# Altium PCB SMS.PcbDoc
Units mm, origin at the board's own origin, x right, y up, seen from the top; angles counter-clockwise.
Board outline 38 x 48 mm, 2 copper layers (Top Layer, Bottom Layer); 37 components, 33 nets, 144 pads, 37 vias.
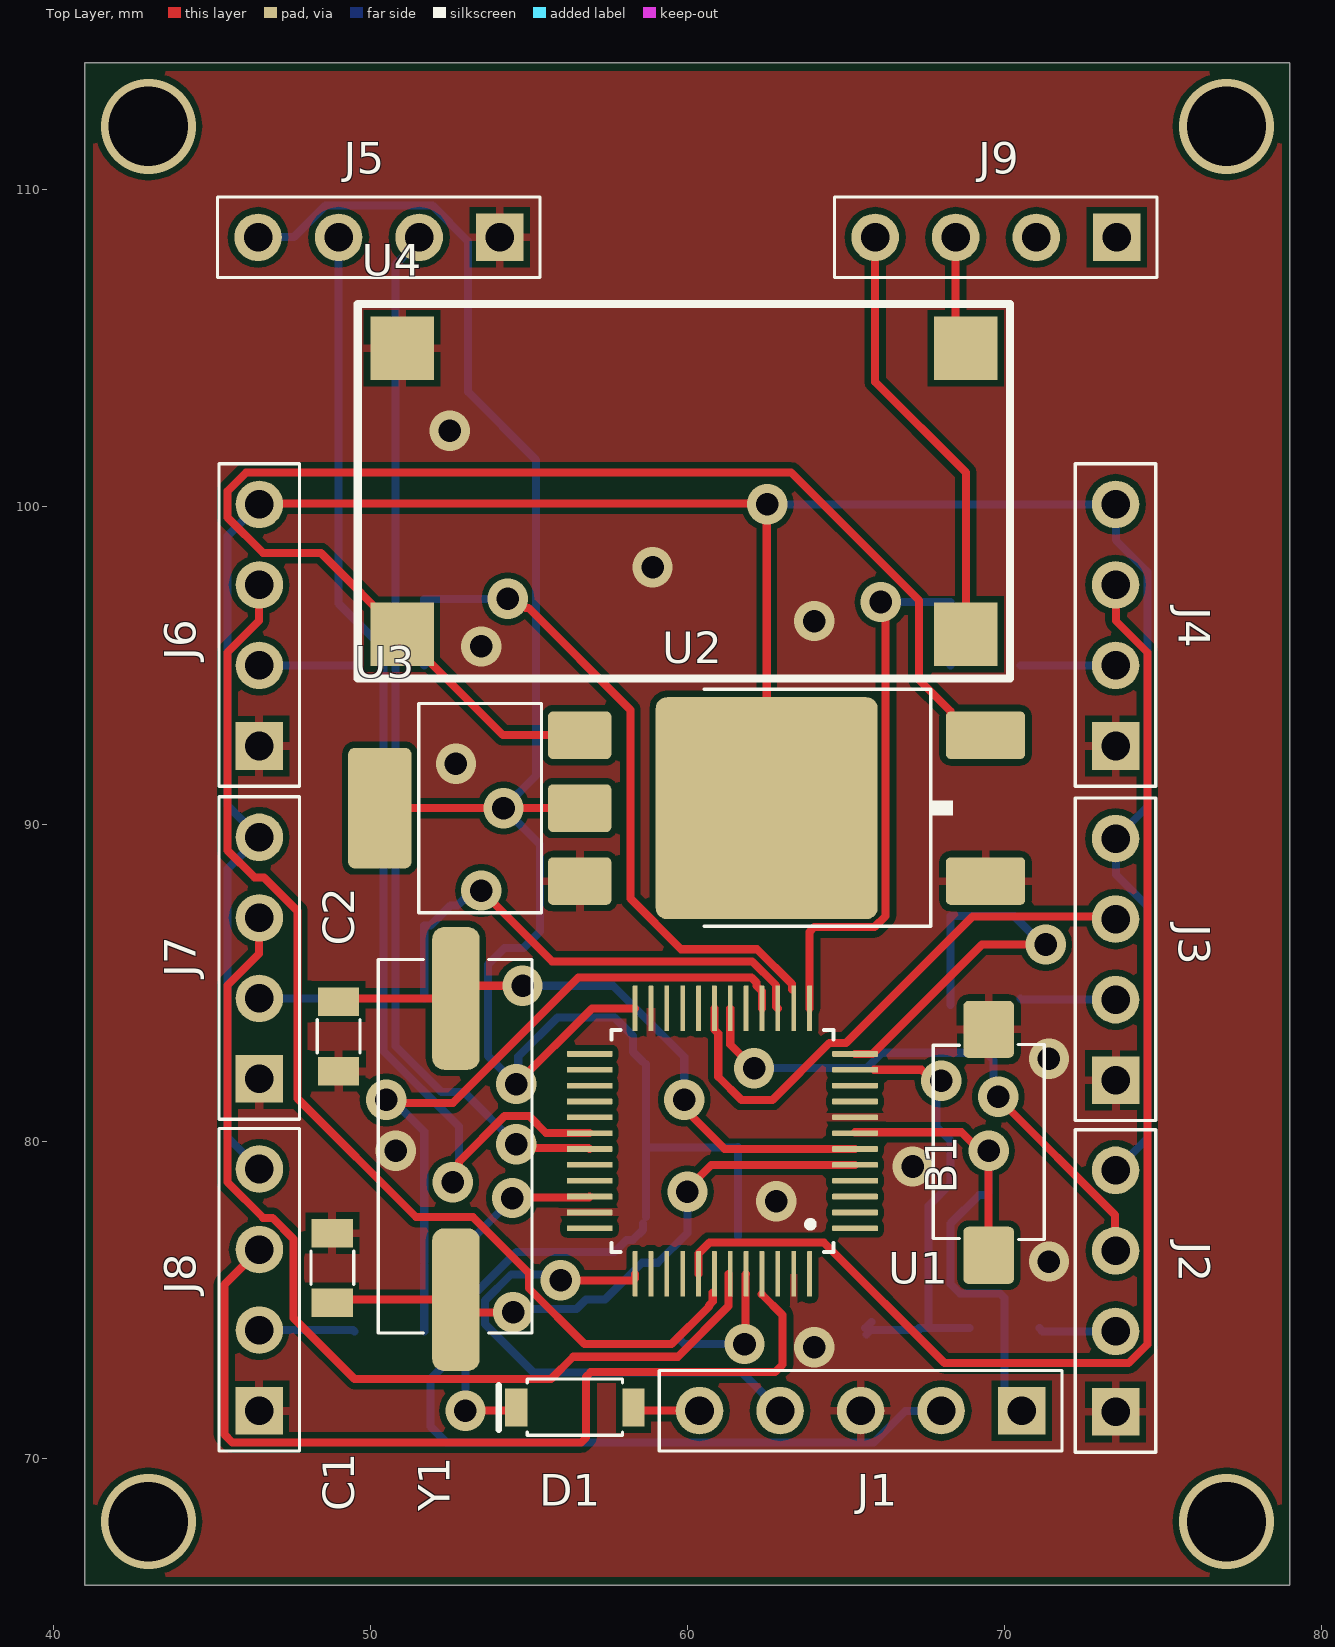
[diagram p0: Top Layer view]
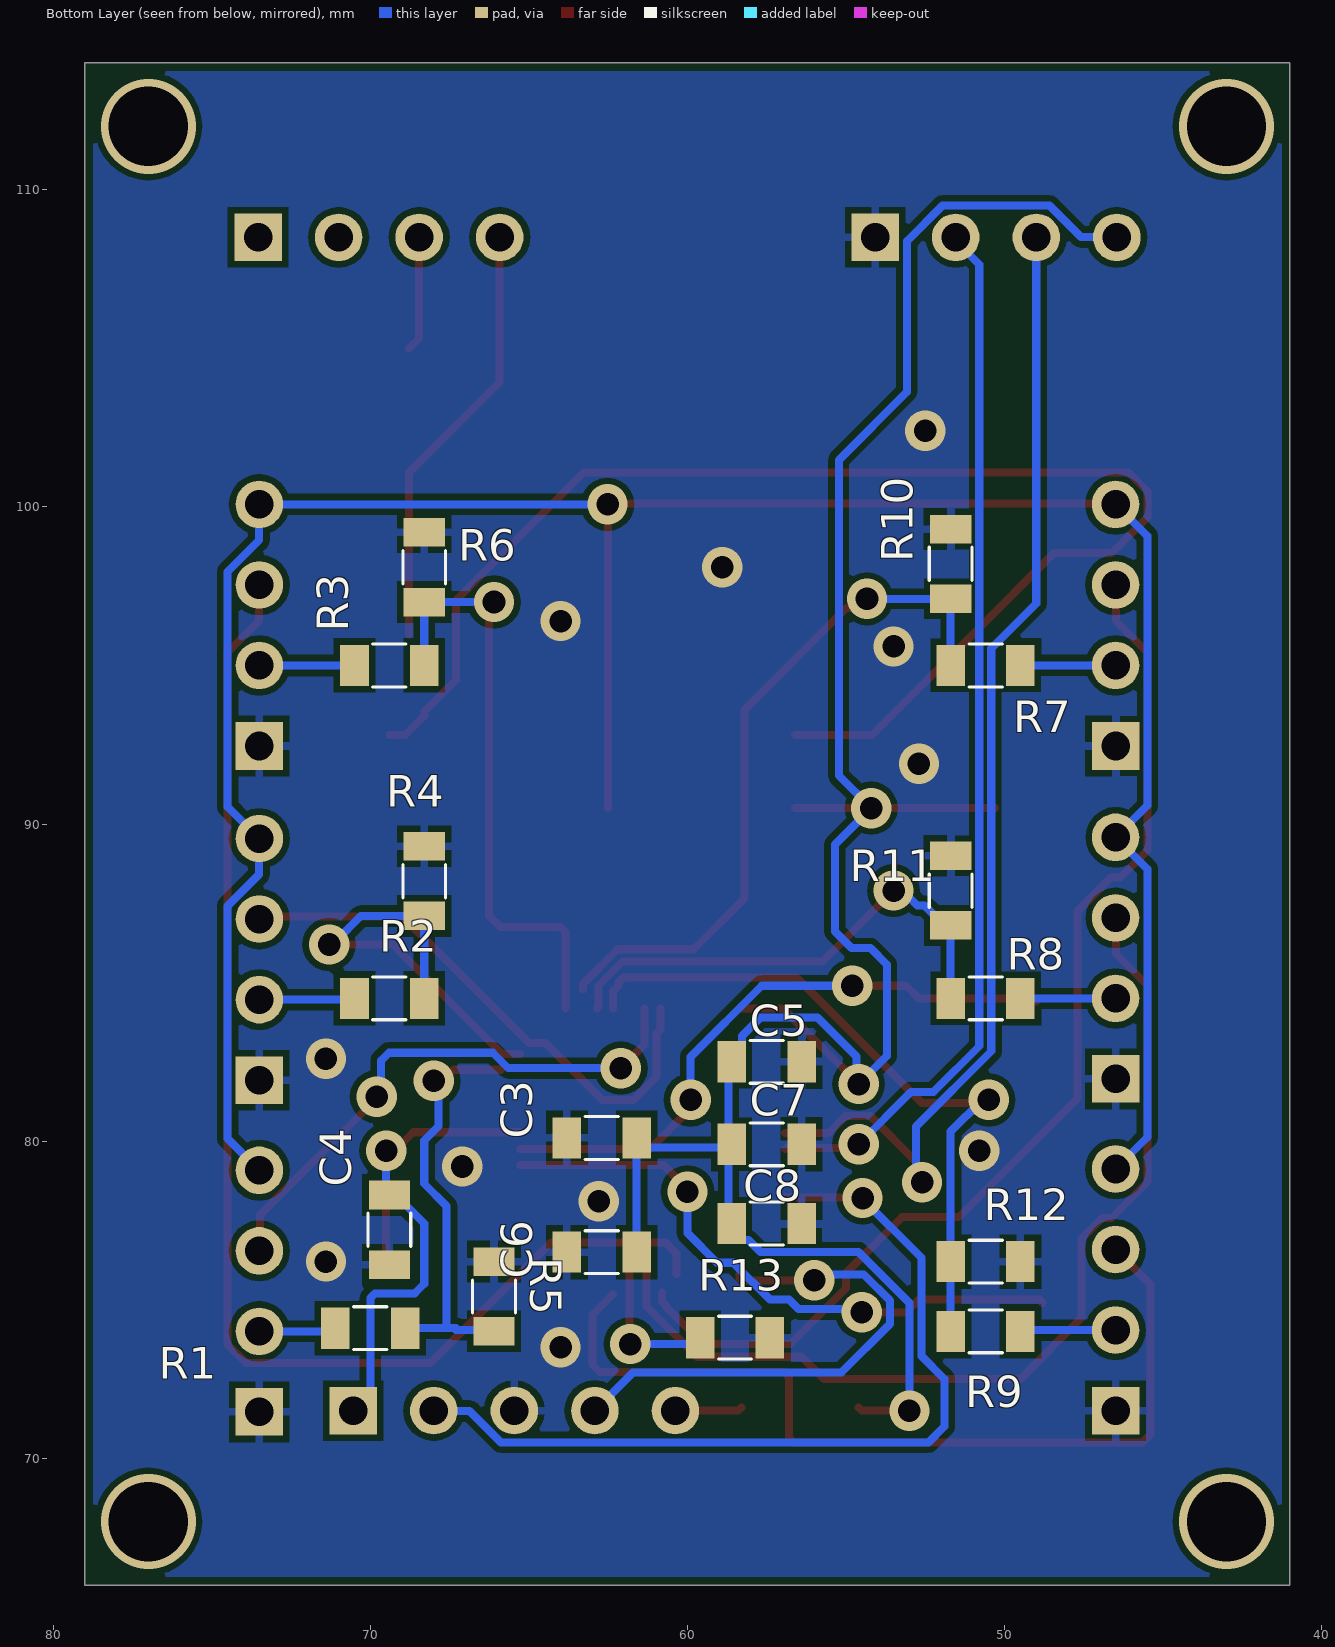
[diagram p1: Bottom Layer view, seen from below]
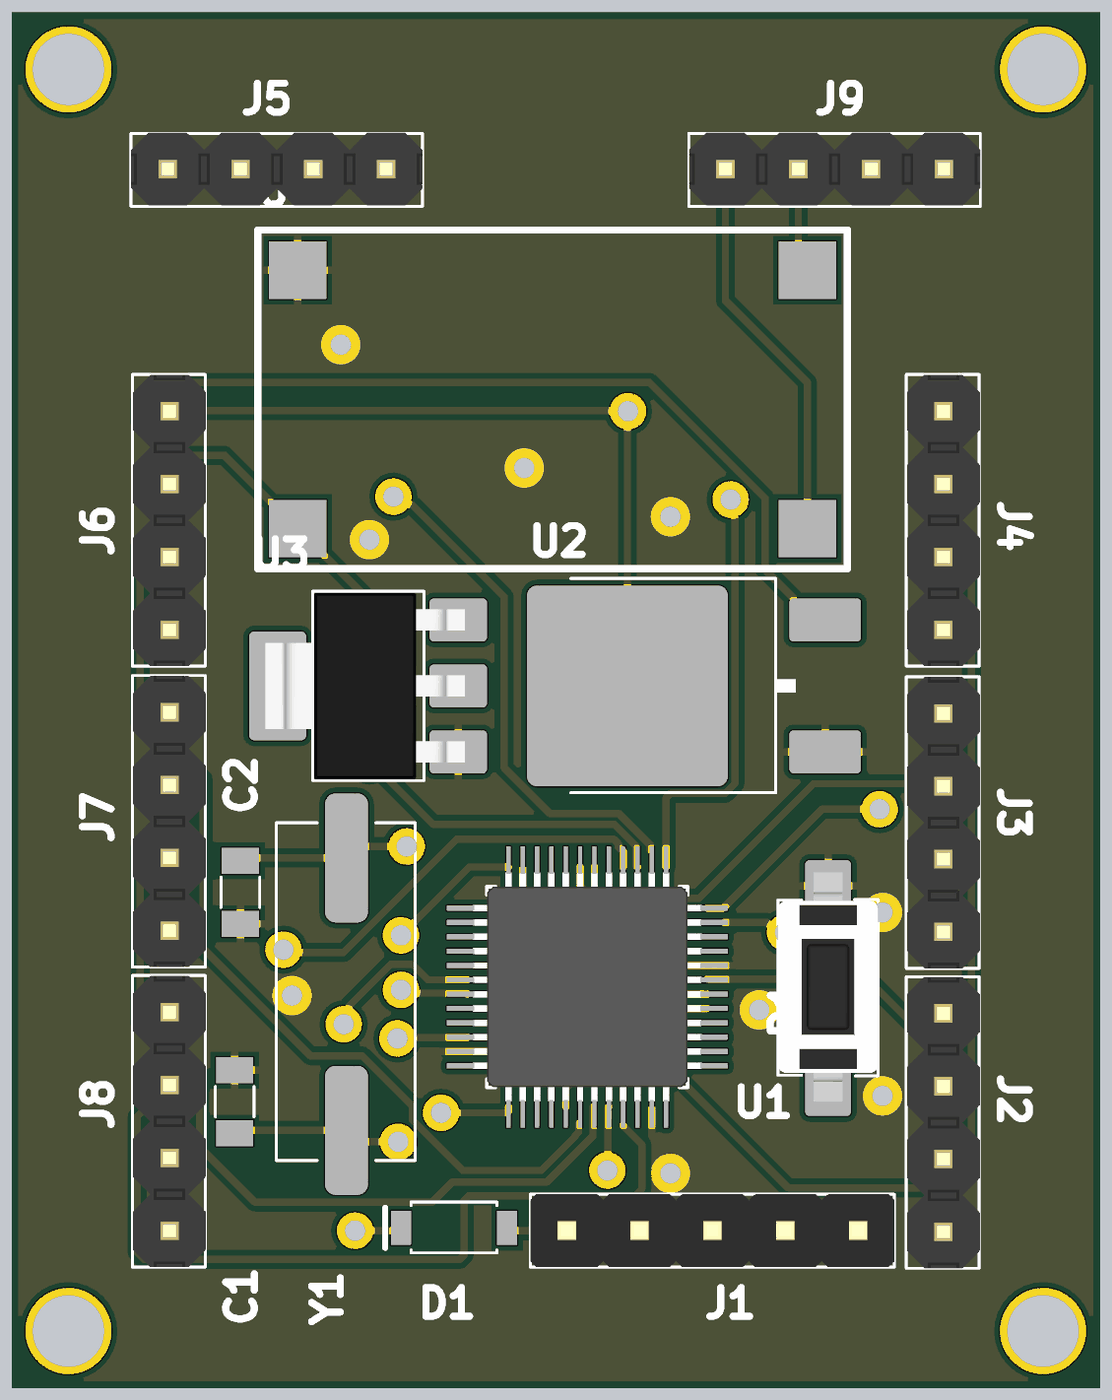
[diagram p2: 3D render of the assembled board from above, using the file's embedded part models]

## Layer stack, top to bottom
Top Solder: solder mask 0.0102, Solder Resist, Dk 3.5
Top Layer: signal copper 0.0356
Dielectric 1: dielectric 0.32, FR-4, Dk 4.8
Bottom Layer: signal copper 0.0356
Bottom Solder: solder mask 0.0102, Solder Resist, Dk 3.5

## Board outline
41,66 41,114 79,114 79,66

## Design rules (kind name [scope] priority, off if disabled: settings)
AcuteAngle [All] p1: minimum=3.50000000000000E+0001 checktracksonly=FALSE
BoardOutlineClearance "BoardOutlineClearance 1" [All] p1: gap=0.25 ignorepadtopadclearanceinfootprint=FALSE except(0: Arc-SplitContinuation Track-SplitContinuation SMDPad-SplitContinuation THPad-SplitContinuation Via-SplitContinuation Fill-SplitContinuation Poly-SplitContinuation Region-SplitContinuation Text-SplitContinuation) // Milling
Clearance "Clearance-1 1/2 Oz" [All] p1: gap=0.125 ignorepadtopadclearanceinfootprint=FALSE except(0.2: Arc-Fill Arc-Poly Track-Fill Track-Poly SMDPad-SMDPad SMDPad-Fill SMDPad-Poly THPad-Fill THPad-Poly Via-Fill Via-Poly Fill-Fill Fill-Poly Poly-Poly Poly-Region Poly-Text; 0.25: Arc-Hole Track-Hole SMDPad-Hole THPad-Hole Via-Hole Fill-Hole Poly-Hole Region-Hole Text-Hole) // Standart
ComponentClearance [All] p1: gap=0.1 collisioncheckmode=3 verticalgap=0.1 showdistances=FALSE
DiffPairsRouting "DiffPairsRouting 1/2 Oz" [All] p1: maxlimit=0.254 minlimit=0.125 mostfreqgap=0.254 toplayer_minwidth=0.125 toplayer_maxwidth=0.381 toplayer_prefwidth=0.381 bottomlayer_minwidth=0.125 bottomlayer_maxwidth=0.381 bottomlayer_prefwidth=0.381 maxuncoupledlength=12.7
HoleSize "Minimum HoleSize" [IsPad] p1: absolutevalues=TRUE maxlimit=5.9 minlimit=0.6 maxpercent=80.000 minpercent=20.000
HoleSize "Minimum HoleSize VIA 1" [IsVia] p2: absolutevalues=TRUE maxlimit=5.9 minlimit=0.3 maxpercent=80.000 minpercent=20.000 // Standart
HoleToHoleClearance Hole2HoleClearance [All] p1: gap=0.25 allowstackedmicrovias=FALSE
MinimumAnnularRing "Minimum AR VIA Standart" [All] p1: minimumring=0.15
MinimumAnnularRing "Minimum AR PAD Standart" [All] p2: minimumring=0.2
MinimumSolderMaskSliver "SolderMask Bridge Standart" [All] p1: minsoldermaskwidth=0.15 // All Masks
PlaneClearance "PlaneClearance-1 1/2 Oz" [All] p1: clearance=0.2 // Standart
PlaneConnect "TermalConnect-1 1/2 Oz" [All] p1: planeconnectstyle=Relief reliefexpansion=0.2 reliefentries=4 reliefconductorwidth=0.2 reliefairgap=0.2 // Standart
PolygonConnect "PolygonConnect-1 1/2 Oz" [All] p1: thpad.connectstyle=Relief thpad.reliefconductorwidth=0.254 thpad.reliefentries=4 thpad.polygonreliefangle="90 Angle" thpad.airgapwidth=0.2 smdpad.connectstyle=Relief smdpad.reliefconductorwidth=0.254 smdpad.reliefentries=4 smdpad.polygonreliefangle="90 Angle" smdpad.airgapwidth=0.2 via.connectstyle=Direct via.reliefconductorwidth=0.254 via.reliefentries=4 via.polygonreliefangle="90 Angle" via.airgapwidth=0.254 // Standart
RoutingCorners [All] p1 off: cornerstyle=45-Degree minsetback=2.54 maxsetback=2.54
RoutingVias [All] p1: holewidth=0.4 width=0.8 viastyle="Through Hole" minholewidth=0.3 minwidth=0.6 maxholewidth=5.9 maxwidth=8.9
SilkToSilkClearance Silk2SilkClearance [All] p1 off: silktosilkclearance=0.15
SilkToSolderMaskClearance Silk2SolderMaskClearance [IsPad] p1 off: minsilkscreentomaskgap=0.15 clearancetoexposedcopper=TRUE
SolderMaskExpansion SolderMaskExpansion-1 [All] p1: expansion=0.05 istentingtop=FALSE // Standart
UnRoutedNet [All] p1: checkbadconnections=TRUE
Width "Width 1/2 Oz" [All] p1: maxlimit=10 minlimit=0.125 preferedwidth=0.254 checkconnectedcopper=TRUE
19 further rules are at their usual default settings.

## Components (designator, comment, footprint, x,y, rotation, side; value= is the part's Value field where it differs from the comment)
B1 "But" "BUTTON 6x3.5" 69.5,83.525 r0 top
C1 "3.9pF" "0805 Capicator" 48.8,76 r270 top
C2 "3.9pF" "0805 Capicator" 49,83.3 r90 top
C3 "0.1uF" "0805 Capicator" 62.7,80.1 r180 bottom
C4 "0.1uF" "0805 Capicator" 69.4,77.2 r90 bottom
C5 "0.1uF" "0805 Capicator" 57.5,82.5 r0 bottom
C6 "0.1uF" "0805 Capicator" 62.7,76.5 r180 bottom
C7 "0.1uF" "0805 Capicator" 57.5,79.9 r0 bottom
C8 "4.7uF" "0805 Capicator" 57.5,77.4 r0 bottom
D1 "Diode" sod-123 58.3,71.6 r180 top
J1 "PLS 5x1" "PLS 5x1" 70.54,71.5 r180 top
J2 "PLS 4x1" "PLS 4x1" 73.5,71.46 r90 top
J3 "PLS 4x1" "PLS 4x1" 73.5,81.92 r90 top
J4 "PLS 4x1" "PLS 4x1" 73.5,92.46 r90 top
J5 "PLS 4x1" "PLS 4x1" 54.08,108.5 r180 top
J6 "PLS 4x1" "PLS 4x1" 46.5,92.46 r90 top
J7 "PLS 4x1" "PLS 4x1" 46.5,81.96 r90 top
J8 "PLS 4x1" "PLS 4x1" 46.5,71.5 r90 top
J9 "PLS 4x1" "PLS 4x1" 73.54,108.5 r180 top
R1 "1k" "0805 Resistor" 70,74.1 r180 bottom
R2 "1k" "0805 Resistor" 69.4,84.5 r180 bottom
R3 "1k" "0805 Resistor" 69.4,95 r180 bottom
R4 "2k" "0805 Resistor" 68.3,88.2 r270 bottom
R5 "2k" "0805 Resistor" 66.1,75.1 r270 bottom
R6 "2k" "0805 Resistor" 68.3,98.1 r270 bottom
R7 "1k" "0805 Resistor" 50.6,95 r0 bottom
R8 "1k" "0805 Resistor" 50.6,84.5 r0 bottom
R9 "1k" "0805 Resistor" 50.6,74 r0 bottom
R10 "2k" "0805 Resistor" 51.7,98.2 r270 bottom
R11 "2k" "0805 Resistor" 51.7,87.9 r270 bottom
R12 "2k" "0805 Resistor" 50.6,76.2 r0 bottom
R13 "3.9k" "0805 Resistor" 58.5,73.8 r0 bottom
U1 "STM32F103C6T6" STM32F103C6T6 61.1,80 r180 top
U2 "LDO 5V" TO-252 69.4,90.5 r90 top
U3 "LDO 3.3V" SOT-223 56.6,90.5 r90 top
U4 "DC-DC" DC-DC 61.033,100.238 r180 top
Y1 "8MHz" hc-49sm 52.7,84.5 r270 top

## Footprints (in the part's own frame and the unit in brackets; to place one, negate y for a bottom-side part, rotate by r counter-clockwise, add the part's x,y. Pads: shape width x height; smd on the part's side, far side on the other; paste and mask are expansions set on the pad)
"0805 Capicator" [mm]
  rect 0.9x1.3 smd: 1(-1.1,0) 2(1.1,0)
  silkscreen extent -0.53,-0.67 0.53,0.67, body extent -1.05,-0.67 1.05,0.68, height 0.75
"0805 Resistor" [mm]
  rect 0.9x1.3 smd: 1(-1.1,0) 2(1.1,0)
  silkscreen extent -0.53,-0.67 0.53,0.67, body extent -1.05,-0.67 1.05,0.68, height 0.6
"BUTTON 6x3.5" [mm]
  rrect20% 1.6x1.8 smd: 1(0,0) 2(0,-7.125)
  silkscreen extent -1.75,-6.63 1.75,-0.48, body extent -1.75,-7.52 1.75,0.48, height 4.3
DC-DC [mm]
  rect 2x2 smd: 1(-7.747,4.254) 2(-7.747,-4.763) 3(10.033,4.255) 4(10.033,-4.762)
  silkscreen extent -9.14,-6.16 11.43,5.65
hc-49sm [mm]
  rrect50% 4.5x1.5 smd: 1(0,0) 2(9.5,0)
  silkscreen extent -1.23,-2.45 10.55,2.4, body extent -1.7,-2.44 11.1,2.39
"PLS 4x1" [mm] "Connector; Header; 5 Position"
  rect 1.5x1.5 hole 0.9: 1(0,0)
  round 1.5 hole 0.9: 2(2.54,0) 3(5.08,0) 4(7.62,0)
  silkscreen extent -1.27,-1.27 8.9,1.27, body extent -1.27,-1.3 8.89,1.24, height 8.6
"PLS 5x1" [mm] "Connector; Header; 5 Position"
  rect 1.5x1.5 hole 0.9: 1(0,0)
  round 1.5 hole 0.9: 2(2.54,0) 3(5.08,0) 4(7.62,0) 5(10.16,0)
  silkscreen extent -1.27,-1.27 11.43,1.27, body extent -1.28,-1.28 11.42,1.26, height 8.54
sod-123 [mm]
  rect 0.7x1.2 smd: 1(0,0) 2(3.7,0)
  silkscreen extent 0.35,-0.9 4.25,0.87, body extent 0,-0.8 3.7,0.8
SOT-223 [mm]
  rrect20% 1.5x2 smd: 1(-2.3,0) 2(0,0) 3(2.3,0)
  rrect20% 3.8x2 smd: 2(0,6.3)
  silkscreen extent -3.3,1.2 3.3,5.07, body extent -3.25,-0.23 3.25,6.73, height 1.7
STM32F103C6T6 [mm]
  rrect25% 1.44x0.18 smd: 1(-4.185,2.75) 2(-4.185,2.25) 3(-4.185,1.75) 4(-4.185,1.25) 5(-4.185,0.75) 6(-4.185,0.25) 7(-4.185,-0.25) 8(-4.185,-0.75) 9(-4.185,-1.25) 10(-4.185,-1.75) 11(-4.185,-2.25) 12(-4.185,-2.75) 25(4.185,-2.75) 26(4.185,-2.25) 27(4.185,-1.75) 28(4.185,-1.25) 29(4.185,-0.75) 30(4.185,-0.25) 31(4.185,0.25) 32(4.185,0.75) 33(4.185,1.25) 34(4.185,1.75) 35(4.185,2.25) 36(4.185,2.75)
  rrect25% 0.15x1.44 smd: 13(-2.75,-4.185) 14(-2.25,-4.185) 15(-1.75,-4.185) 16(-1.25,-4.185) 17(-0.75,-4.185) 18(-0.25,-4.185) 19(0.25,-4.185) 20(0.75,-4.185) 21(1.25,-4.185) 22(1.75,-4.185) 23(2.25,-4.185) 24(2.75,-4.185) 37(2.75,4.185) 38(2.25,4.185) 39(1.75,4.185) 40(1.25,4.185) 41(0.75,4.185) 42(0.25,4.185) 43(-0.25,4.185) 44(-0.75,4.185) 45(-1.25,4.185) 46(-1.75,4.185) 47(-2.25,4.185) 48(-2.75,4.185)
  silkscreen extent -3.5,-3.5 3.5,3.5, body extent -4.5,-4.5 4.5,4.5, height 0.72
TO-252 [mm]
  rrect20% 1.5x2.5 smd: 1(-2.3,0) 3(2.3,0)
  rrect10% 7x7 smd: 2(0,6.9)
  silkscreen extent -3.72,1.02 3.75,8.87, body extent -3.38,-0.65 3.35,9.45, height 2.37

## Part data
B1: library part Button, "Button 2 Conn SMD"
C1 C2: library part "Cap 39pF"
C3 C4 C5 C6 C7: library part "Cap 0.1uF"
C8: library part "Cap 4.7uF"
D1: library part "Diode Schottky", "0.5 A, Low Forward Voltage less than 385 mV, 400 mW Power Dissipation Package"
J1: library part "Conn 5", "Header, 5-Pin"
J2 J3 J4 J5 J6 J7 J8 J9: library part "Conn 4", "Header, 4-Pin"
R1 R2 R3 R7 R8 R9: library part "Res 1k"
R4 R5 R6 R10 R11 R12: library part "Res 2k"
R13: library part "Res 3.9k"
U2: "LDO Regulator Pos 5V 1A"
U3: "LDO Regulator Pos 3.3V 1.3A 4-Pin(3+Tab) SOT-223 T/R"
Y1: library part "Crystal 8MHz", "Crystal. HC-49SM (US)"

## Via types
v1: diameter 1.27, hole 0.711, Top Layer to Bottom Layer, 33 vias
v2: diameter 3, hole 2.5, Top Layer to Bottom Layer, 4 vias

## Nets (pads, with @x,y where several pads share a name; then routed paths per layer and width w, separated by ;. In a path a pad name is that pad's centre, name@x,y a point inside that pad or via, vN(x,y) a via of type N, cw(c..) or ccw(c..) an arc to the next point about the centre after c; other vN are vias at no path point)
+3.3V: C3.2 C5.2 C6.2 C7.2 C8.2 D1.2 J5.4 U1.24 U3.2 | length 76.8
  Top Layer w0.254: U3.2@50.3,90.5 v1(54.2,90.5) U3.2@56.6,90.5 ; v1(53,71.5) 54.5,71.5 D1.2 ; v1(54.6,81.8) 56.985,84.185 U1.24
  Bottom Layer w0.254: J5.4 46.468,108.508 47.591,108.508 48.585,109.502 51.955,109.502 53.078,108.379 53.078,103.629 55.224,101.483 55.224,91.524 v1(54.2,90.5) 55.345,89.355 55.345,86.607 54.826,86.087 54.233,86.087 53.713,85.567 53.713,82.687 v1(54.6,81.8) 54.664,81.864 54.664,82.664 55.9,83.9 57.7,83.9 58.285,83.315 58.285,82.815 C5.2 ; v1(53,71.5) 53,74.89 54.608,76.498 57.698,76.498 58.077,76.877 58.277,76.877 58.6,77.2 C8.2 ; C8.2@58.7,77.6 C7.2@58.7,79.8 ; C5.2@58.7,82.435 58.7,79.9 58.8,79.8 C3.2@61.6,79.8 ; C6.2@61.6,77 C3.2@61.6,79.818
+5V: J2.4 J3.4 J4.4 J6.4 J7.4 J8.4 U2.2 | length 81.9
  Top Layer w0.254: J6.4 46.52,100.1 v1@62.5,100.1 ; U2.2 v1@62.5,100.1 ; v1(62.52,100.08) v1@62.5,100.1
  Bottom Layer w0.254: J8.4 45.498,80.122 45.498,88.578 J7.4 45.498,90.582 45.498,99.078 J6.4 ; v1(62.52,100.08) J4.4 73.508,100.072 73.508,98.949 74.502,97.955 74.502,90.542 J3.4 73.508,89.532 73.508,88.409 74.502,87.415 74.502,80.082 J2.4
+7.4V: U2.3 U3.3 U4.3 | length 43.9
  Top Layer w0.254: U3.3 54.183,92.8 U4.3 48.441,98.542 46.621,98.542 45.498,99.665 45.498,100.495 46.085,101.082 63.272,101.082 67.3,97.054 67.3,94.548 68.291,93.557 68.291,93.421 68.912,92.8 U2.3
+12V: J9.4 U4.1 | length 13.7
  Top Layer w0.254: J9.4 65.92,103.939 68.78,101.079 U4.1
echo1_3.3: R1.2 R5.2 U1.11 | length 14.3
  Top Layer w0.254: U1.11@65.878,82.25 67.375,82.25 67.725,81.9 v1(68,81.9)
  Bottom Layer w0.254: R5.2@65.6,74.1 R5.2@65.8,74.3 ; R5.2@65.64,73.9 65.789,74.049 67.3,74.049 ; 67.3,74.1 67.6,74.1 67.7,74.1 ; v1(68,81.9) 67.848,81.748 67.848,80.471 68.3,80.019 68.3,78.656 67.6,77.956 67.6,74.2 67.7,74.1 ; R1.2 67.7,74.1
echo1_5: J2.2 R1.1 | length 2.4
  Bottom Layer w0.254: R1.1 71.2,74 J2.2
echo2_3.3: R2.2 R4.2 U1.12 | length 13.4
  Top Layer w0.254: U1.12 65.841,82.75 69.291,86.2 v1(71.3,86.2)
  Bottom Layer w0.254: R2.2@68.3,84.3 R2.2 R4.2 70.3,87.1 v1@71.1,86.3
echo2_5: J3.2 R2.1 | length 3
  Bottom Layer w0.254: R2.1 70.54,84.46 J3.2
echo3_3.3: R3.2 R6.2 U1.13 | length 19.2
  Top Layer w0.254: U1.13 63.85,86.599 63.999,86.748 65.899,86.748 66.252,87.101 66.252,96.848 v1(66.1,97)
  Bottom Layer w0.254: v1(66.1,97) R6.2 R3.2
echo3_5: J4.2 R3.1 | length 3
  Bottom Layer w0.254: R3.1 J4.2
echo4_3.3: R7.2 R10.2 U1.14 | length 22.4
  Top Layer w0.254: v1(54.337,97.1) 54.612,97.1 54.895,96.817 54.983,96.817 58.2,93.6 58.2,87.649 59.799,86.05 62.198,86.05 63.298,84.949 U1.14@63.298,84.778
  Bottom Layer w0.254: R7.2 R10.2 v1(54.337,97.1)
echo4_5: J6.2 R7.1 | length 3
  Bottom Layer w0.254: J6.2 R7.1
echo5_3.3: R8.2 R11.2 U1.15 | length 15.8
  Top Layer w0.254: v1(53.5,87.9) 55.729,85.671 62.041,85.671 62.798,84.913 62.798,84.237 U1.15
  Bottom Layer w0.254: R8.2 R11.2 51.9,86.8 52.527,87.427 52.752,87.427 53.225,87.9 v1(53.5,87.9)
echo5_5: J7.2 R8.1 | length 3
  Bottom Layer w0.254: J7.2 R8.1
echo6_3.3: R9.2 R12.2 U1.16 | length 22.1
  Top Layer w0.254: v1(50.5,81.3) 50.6,81.2 52.6,81.2 56.557,85.157 62.018,85.157 62.177,84.998 62.177,84.899 62.35,84.726 U1.16
  Bottom Layer w0.254: v1(50.5,81.3) 50.7,81.3 51.7,80.3 R12.2 ; R9.2 R12.2@51.7,76.1
echo6_5: J8.2 R9.1 | length 3
  Bottom Layer w0.254: J8.2 49.46,74.04 R9.1
GND: B1.1 C1.1 C2.1 C3.1 C4.1 C5.1 C6.1 C7.1 C8.1 J1.3 J2.1 J3.1 J4.1 J5.1 J6.1 J7.1 J8.1 R4.1 R5.1 R6.1 R10.1 R11.1 R12.1 R13.1 U1.8 U1.23 U1.35 U1.47 U2.1 U3.1 U4.4
  other v1: 64,73.5 71.4,76.2 62.8,78.1 67.1,79.2 50.8,79.7 71.4,82.6 52.7,91.9 53.5,95.6 64,96.4 58.9,98.1 52.5,102.4
GND12: J9.3 U4.2 | length 3.6
  Top Layer w0.254: J9.3 68.46,105.32 U4.2
NetC1_2: C1.2 U1.5 Y1.2 | length 19.4
  Top Layer w0.254: C1.2 48.9,75 Y1.2 53.099,74.601 v1(54.501,74.601) ; v1(60,78.4) 60,78.5 60.75,79.25 U1.5
  Bottom Layer w0.254: v1(54.501,74.601) 54.602,74.702 56.502,74.702 56.8,75 57.4,75 58.565,76.165 59.065,76.165 60,77.1 v1(60,78.4)
NetC2_2: C2.2 U1.6 Y1.1 | length 19.6
  Top Layer w0.254: C2.2 49.1,84.5 Y1.1 53.1,84.9 v1(54.8,84.9) ; v1(59.9,81.3) 59.9,81.025 61.175,79.75 U1.6
  Bottom Layer w0.254: v1(54.8,84.9) 57.656,84.9 59.9,82.656 v1(59.9,81.3)
NetD1_1: D1.1 J1.5 | length 2.1
  Top Layer w0.254: D1.1 58.4,71.5 J1.5
NetR13_2: R13.2 U1.44 | length 4.4
  Top Layer w0.254: v1(61.8,73.6) 61.825,73.625 61.825,75.79 U1.44
  Bottom Layer w0.254: R13.2@59.7,73.8 59.9,73.6 v1(61.8,73.6)
NRST: B1.2 C4.2 J1.1 U1.7 | length 18.2
  Top Layer w0.254: U1.7@65.285,80.279 68.646,80.279 69.225,79.7 v1(69.5,79.7) B1.2
  Bottom Layer w0.254: v1(69.5,79.7) 69.5,78.4 C4.2 69.2,78.3 68.3,77.4 68.3,75.5 68.6,75.2 69.851,75.2 70,75.051 70,72.04 J1.1
SWCLK: J1.4 U1.37 | length 16.5
  Top Layer w0.254: v1(56,75.611) 58.298,75.611 58.35,75.663 U1.37
  Bottom Layer w0.254: v1(56,75.611) 55.811,75.8 54.446,75.8 53.614,74.968 53.614,74.234 55.148,72.7 61.72,72.7 J1.4
SWDIO: J1.2 U1.34 | length 27.5
  Top Layer w0.254: v1(54.476,78.204) 54.497,78.225 56.89,78.225 U1.34
  Bottom Layer w0.254: v1(54.476,78.204) 54.476,78.176 52.621,76.321 52.621,73.221 51.9,72.5 51.9,71 52.402,70.498 65.875,70.498 66.869,71.492 67.992,71.492 J1.2
trig1: J2.3 U1.18 | length 17.7
  Top Layer w0.254: U1.18 61.35,83.05 v1(62.1,82.3) ; v1(69.8,81.4) 69.8,81.351 73.48,77.671 73.48,76.56 J2.3
  Bottom Layer w0.254: v1(62.1,82.3) 65.65,82.3 66.137,82.787 69.413,82.787 69.657,82.543 69.657,81.543 v1(69.8,81.4)
trig2: J3.3 U1.19 | length 17.5
  Top Layer w0.254: U1.19 60.85,83.512 60.971,83.391 60.971,82.029 61.7,81.3 62.682,81.3 64.474,83.092 64.995,83.092 68.99,87.087 73.413,87.087 J3.3
trig3: J4.3 U1.41 | length 41.1
  Top Layer w0.254: U1.41 60.35,76.455 60.695,76.8 64.3,76.8 68.102,72.998 73.915,72.998 74.502,73.585 74.502,95.415 73.508,96.409 73.508,97.532 J4.3
trig4: J6.3 U1.42 | length 35.1
  Top Layer w0.254: J6.3 46.492,97.532 46.492,96.409 45.498,95.415 45.498,89.165 46.353,88.31 46.647,88.31 47.7,87.257 47.7,81.346 51.446,77.6 53.237,77.6 54.997,75.84 54.997,75.36 56.757,73.6 59.5,73.6 60.677,74.777 60.677,74.82 60.798,74.941 U1.42@60.798,75.222
trig5: J7.3 U1.43 | length 30.6
  Top Layer w0.254: J7.3 46.492,87.032 46.492,85.909 45.498,84.915 45.498,78.705 46.621,77.582 46.915,77.582 47.58,76.917 47.58,74.42 49.502,72.498 55.697,72.498 56.399,73.2 59.7,73.2 61.298,74.798 U1.43@61.298,75.815
trig6: J8.3 U1.45 | length 28.6
  Top Layer w0.254: J8.3 45.4,75.48 45.4,70.744 45.646,70.498 56.651,70.498 56.8,70.647 56.8,72.564 56.949,72.713 62.764,72.713 63,72.949 63,74.515 U1.45@62.344,75.171
USART_to_Rasp_RX: J5.2 U1.31 | length 33.3
  Top Layer w0.254: v1(54.6,79.9) 54.713,79.787 56.878,79.787 U1.31
  Bottom Layer w0.254: J5.2 51.54,108.385 50.798,107.643 50.798,82.992 52.247,81.543 52.957,81.543 v1(54.6,79.9)
USART_to_Rasp_TX: J5.3 U1.30 | length 37.1
  Top Layer w0.254: v1(52.6,78.7) 52.794,78.894 52.794,79.349 54.233,80.787 55.009,80.787 55.546,80.25 U1.30
  Bottom Layer w0.254: J5.3 49,96.956 50.419,95.537 50.419,82.835 52.794,80.46 52.794,78.894 v1(52.6,78.7)
pads on no net: J9.1 J9.2 U1.1 U1.2 U1.3 U1.4 U1.9 U1.10 U1.17 U1.20 U1.21 U1.22 U1.25 U1.26 U1.27 U1.28 U1.29 U1.32 U1.33 U1.36 U1.38 U1.39 U1.40 U1.46 U1.48
copper on no net:
  other v2: 43,68 77,68 43,112 77,112

## Polygon pours and split planes (outlines as drawn)
GND on Bottom Layer "GND_poly_lower" (solid, remove dead copper, pour order 1): 41,66 41,114 79,114 79,66
GND on Top Layer "GND_poly_upper" (solid, remove dead copper, pour order 0): 41,66 41,114 79,114 79,66